# Altium PCB Power_Board_Gan_Cuk.PcbDoc (part 2 of 4)
Units mil, origin at the board's own origin, x right, y up, seen from the top; angles counter-clockwise.
Board outline 9910 x 8913.25 mil, 5 copper layers (Top Layer, Middle 1, HF Layer, Middle 4, Bottom Layer), stack 37.051 mil thick; 394 components, 188 nets, 1156 pads, 1424 vias.
Unrouted connection lines stored in the file: 6.
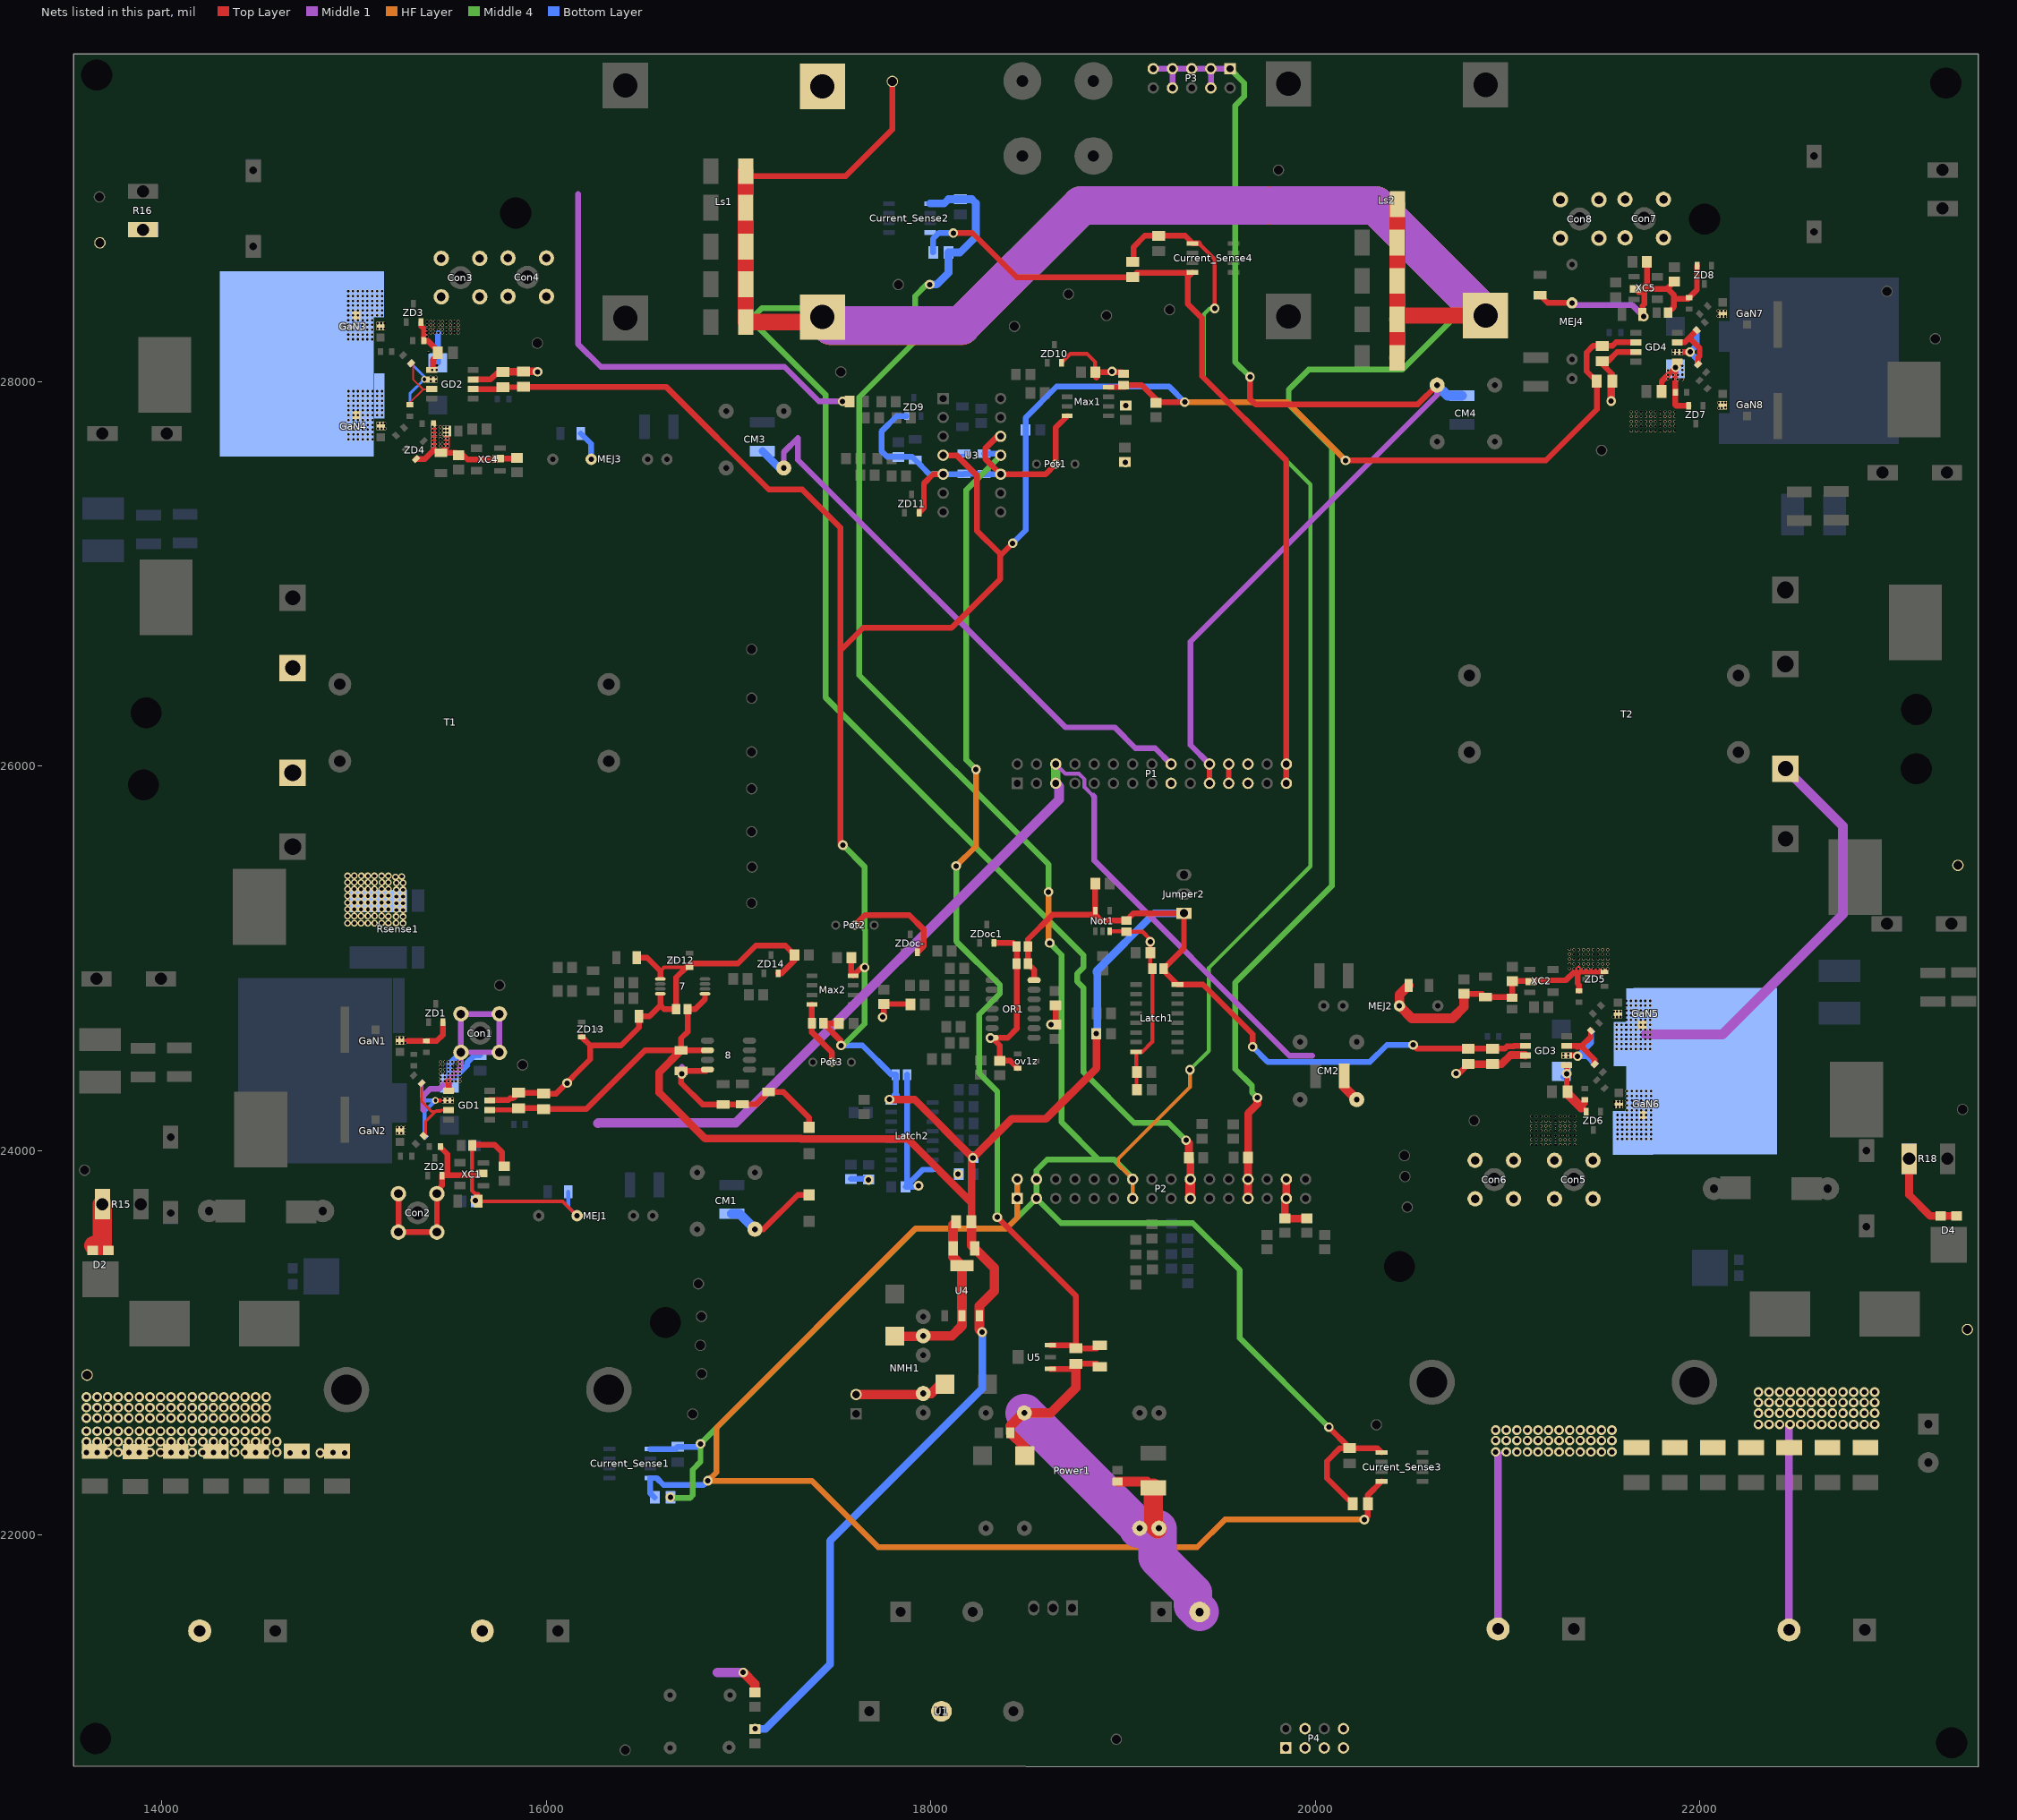
[diagram p5: the nets of this part, all layers, seen from the top]

## Part data
7: library part ina240, "GAIN 20"
C1 C2 C8 C9: "LLS2A332MELC"
C16 C17 C18 C19 C26 C27 C28 C29 C36 C39 C41 C44 C46 C49 C51 C54 Cg1 Cg2 Cg3 Cg4: library part Cap_SMD
  C16 C17 C18 C19 C26 C27 C28 C29: =100nF
  C36 C39: =0.1u
  Cg1: =1u
C20 C21 C22 C23 C30 C31 C32 C33 C57 C60 C61 C62 C65 C68 C69 C71 C76 C82 C83 C84 C85 C87 C89 C96 C99 C100 C101 C104: "Polarized Capacitor (Surface Mount)", LatestRevisionDate=29-May-2009, LatestRevisionNote="IPC-7351 Footprint Added.", PackageDescription="Chip Capacitor", PackageReference=C0805, Published=8-Jun-2000, Publisher="Altium Limited"
C37 C42 C47 C52 C70: library part Cap_tantalum
  C70: ="22uF/ 25V"
C56 C95: library part "Cap Pol3", "Polarized Capacitor (Surface Mount)", LatestRevisionDate=29-May-2009, LatestRevisionNote="IPC-7351 Footprint Added.", PackageDescription="Chip Capacitor", PackageReference=C0805, Published=8-Jun-2000, Publisher="Altium Limited"
C58 C72 C77 C81 C86 C88 C90 C91 C92 C93 C94 C97 Cdev: library part "Cap Semi", "Capacitor (Semiconductor SIM Model)", LatestRevisionDate=29-May-2009, LatestRevisionNote="IPC-7351 Footprint Added.", PackageDescription="Chip Capacitor", PackageReference=C1206, Published=8-Jun-2000, Publisher="Altium Limited"
C59 C63 C64 C98 C102 C103: "Capacitor (Semiconductor SIM Model)", LatestRevisionDate=29-May-2009, LatestRevisionNote="IPC-7351 Footprint Added.", PackageDescription="Chip Capacitor", PackageReference=C1206, Published=8-Jun-2000, Publisher="Altium Limited"
C105 C106 C107 C109 C111: library part "Cap Pol1", "Polarized Capacitor (Radial)", LatestRevisionDate=17-Jul-2002, LatestRevisionNote="Re-released for DXP Platform.", PackageReference=RB7.6-15, Published=8-Jun-2000, Publisher="Altium Limited"
C108 C110: "Capacitor", LatestRevisionDate=17-Jul-2002, LatestRevisionNote="Re-released for DXP Platform.", PackageReference=RAD-0.3, Published=8-Jun-2000, Publisher="Altium Limited"
Cd1 Cd2 Cd3: library part Cd
CM1 CM2 CM3 CM4: "Common mode choke"
Cs1 Cs2 Cs3 Cs4: library part Cap-CS
  Cs4: =990pF
Csnub1 Csnub2: library part Cap-Csnub, =10nF
Current_Sense1 Current_Sense2 Current_Sense3 Current_Sense4: library part "Current Sensor 5A"
D1 D2 D3 D4: "VS-4ESH02HM3"
FB1 FB2 FB3 FB4 FB5 FB6 FB7 FB8 R21 R22 R23 R25 R26 R27 R28 R30 R31 R32 R33 R35 R36 R37 R38 R40: "Resistor", LatestRevisionDate=29-May-2009, LatestRevisionNote="IPC-7351 Footprint Added.", PackageDescription="Chip Resistor", PackageReference=J1-0603, Published=8-Jun-2000, Publisher="Altium Limited"
FB9 FB10 FB11 FB12 FB13 FB14 FB15 NOTR R1 R2 R3 R4 R5 R6 R7 R8 R9 R10 R11 R12 R13 R14 R17 R20 R41 R42 R43 R44 R45 R46 R47 R48 R49 R50 R51 R52 R53 R54 R55 R56 R57 R58 R59 R60 R61 R62 R63 R64 R65 R66 R67 R68 R69 R70 R71 R72 R73 R74 R75 R76 R77 R78 R79 R80 R81 R82 R83 R84 R85 R86 R87 R88 R89 R90 R91 R92 R93 R94 Rdev Rdev2 Rdis1 Rdis2 Rdis3 Rdis4 Rdis5 Rdis6 Rdis7 Rdis8 Res Rl1 Rlatch Rlatch1 ROC Roc1tot Rov Rst: "smd_res"
  FB9 FB10 FB11 FB12 FB15: =0ohm
  FB13 FB14: =0
  NOTR: =50
  R1 R12: =180K
  R2 R3 R4 R5 R7 R8 R9 R11: =475K
  R6 R10: =5K
  R13 R17 R51 R55 R73 R74 R78: =120K
  R14: =1.8k
  R20: =1.8K
  R41 R44 R85 R88: =22k
  R42 R45 R86 R89: =392
  R43 R46 R50 R53 R54 R67 R69 R75 R77 R84 R87 R90: =10k
  R47 R48 R52 R70 R72 R83 R91 R92 R93 R94 Rdev Rdev2: =3.3k
  R49 R79 R81: =1meg
  R56 R61 R66 R68 R71 R82 Res Rlatch Rlatch1 ROC Roc1tot Rov Rst: =100
  R57 R58 R59 R60 R62 R63 R64 R65: =475k
  R76 R80: =10
  Rl1: =100ohms
Grid1: library part "Auxilary connector"
Latch1 Latch2: library part "SR Latch", "CD4043BDR"
Max1 Max2: library part Max942, "MAX942ESA+"
MEJ1 MEJ2 MEJ3 MEJ4: library part "Power supply2"
NMH1: library part NMH----SC_1
Not1: library part Inverter
OC OV: "Typical RED, GREEN, YELLOW, AMBER GaAs LED", LatestRevisionDate=17-Jul-2002, LatestRevisionNote="Re-released for DXP Platform.", PackageDescription="SM LED; 2 Flat Leads", PackageReference=3.2X1.6X1.1, PackageVersion=Feb-2002, Published=8-Jun-2000, Publisher="Altium Limited"
OR1: library part "2 input OR"
ov1z ZD1 ZD2 ZD3 ZD4 ZD5 ZD6 ZD7 ZD8 ZD9 ZD10 ZD11 ZD12 ZD13 ZD14 ZDoc1 ZDoc-: library part Zener_diode, "DZ23C8V2-7-F"
P1: library part "Header 15X2", "Header, 15-Pin, Dual row", LatestRevisionDate=17-Jul-2002, LatestRevisionNote="Re-released for DXP Platform.", Publisher="Altium Limited"
P2: library part "Header 16X2", "Header, 16-Pin, Dual row", LatestRevisionDate=17-Jul-2002, LatestRevisionNote="Re-released for DXP Platform.", Publisher="Altium Limited"
P3: "Header, 5-Pin, Dual row", LatestRevisionDate=17-Jul-2002, LatestRevisionNote="Re-released for DXP Platform.", Publisher="Altium Limited"
P4: library part "Header 4X2", "Header, 4-Pin, Dual row", LatestRevisionDate=17-Jul-2002, LatestRevisionNote="Re-released for DXP Platform.", Publisher="Altium Limited"
Pot1 Pot2 Pot3: library part "TRIM POT", "3296W-1-253LF"
Power1: library part Power_main
R15 R16 R18 R19: "snubber_res_film"
  R15 R16 R19: ="5 ohm"
  R18: =5ohm
R24 R29 R34 R39: library part Res3, "Resistor", LatestRevisionDate=29-May-2009, LatestRevisionNote="IPC-7351 Footprint Added.", PackageDescription="Chip Resistor", PackageReference=J1-0603, Published=8-Jun-2000, Publisher="Altium Limited"
RSP3: library part Res_Rd
SW1: library part SW-PB, "Switch", Published=24-Mar-1999, Publisher="Altium Limited", Revision="July-2002: Re-released for DXP Platform."
U1: library part "P-Terminal 3"
U2: library part "P-Terminal 2"
U3: library part TL074J, "Low-Noise JFET-Input Operational Amplifier", ComponentLink1Description="Manufacturer Link", ComponentLink1URL=http://www.ti.com/, ComponentLink2Description=Datasheet, ComponentLink2URL=http://www-s.ti.com/sc/ds/tl074.pdf, DatasheetVersion=Aug-1996, LatestRevisionDate=04-Mar-2005, LatestRevisionNote="Stylized 3D Model Added.", PackageDescription="DIP; 14 Leads; Row Spacing 7.62 mm; Pitch 2.54 mm", PackageReference=J014, PackageVersion=Jun-1999, Published=16-Jan-2001, Publisher="Altium Limited"
U4: library part µA7805CKTER, "Positive-Voltage Regulator", Code_JEDEC=MO-169, ComponentLink1Description="Manufacturer Link", ComponentLink1URL=http://www.ti.com/, ComponentLink2Description=Datasheet, ComponentLink2URL=http://www-s.ti.com/sc/ds/ua7805.pdf, DatasheetVersion=Jul-1999, Note="Pin 2 is electrically connected to TAB/Pin4.", PackageDescription="PowerFLEX; 3 Leads; Body 10.7 (inc. leads) x 9.5 mm (LxW max)", PackageReference=KTE03, PackageVersion=Jan-2001, Published=15-Apr-2002, Publisher="Altium Limited"
U5: library part µA79M05CKTPR, "Negative-Voltage Regulator", Code_JEDEC=TO-252, ComponentLink1Description="Manufacturer Link", ComponentLink1URL=http://www.ti.com/, ComponentLink2Description=Datasheet, ComponentLink2URL=http://www-s.ti.com/sc/ds/ua79m05.pdf, DatasheetVersion=Apr-2000, Note="Pin 2 is electrically connected to pin4, and not drawn.", PackageDescription="PowerFLEX (D-PAK/TO-252-AA); 3 Leads (1 Cropped); Body 9.7 (inc. leads) x 6.2 mm (LxW max)", PackageReference=KTP02, PackageVersion=Jan-2001, Published=15-Apr-2002, Publisher="Altium Limited"
XC1 XC2 XC4 XC5: library part "power supply"
C01 C02 C03 C04 C05 C011 C022 C033 C044 C055: =2.2uF/250V
C3 C4 C5 C6 C7 C10 C11 C12 C13 C14 C15 CIN1 CIN2 CIN3 CIN4: =10uF/100v
L_snub1 L_snub2: =2.5uH
RSP1: =5ohm
RSP2: ="5 ohm"

## Free pads (board coordinates)
  round 0 hole 161.42: 18(13660,29595) 18(13904,25901) 18(16619,23104) 18(20439,23396) 18(23311,20918) 20(13655,20940) 20(13918,26277) 20(15840,28877) 20(22026,28846) 20(23127,25986) 20(23128,26294) 20(23281,29554)
  rect 669.29x964.57 smd far side: ""(14636,28092) ""(14731,24414)
  rect 140x965 smd far side: ""(15032,28092) ""(15128,24415)
  rect 55x240.16 smd far side: ""(15127,28455)
  rect 55x235 smd far side: ""(15131,27925)
  rect 59.06x287.4 smd far side: ""(15232,24753)
  rect 78.74x204.72 smd far side: ""(15234,24247)
  rect 78.74x230 smd far side: ""(21588,24091) ""(21593,24553)
  rect 140x867 smd far side: ""(21688,24410)
  rect 748.03x866.14 smd far side: ""(22029,24412) ""(22662,28108)
  rect 55x161.42 smd far side: ""(22128,27756) ""(22128,28236)
  rect 140x866.14 smd far side: ""(22225,28108)

## Via types
v1: diameter 15, hole 12, Top Layer to Bottom Layer, 976 vias
v2: diameter 50, hole 28, Top Layer to Bottom Layer, 343 vias
v3: diameter 35, hole 20, Top Layer to Bottom Layer, 74 vias
v4: diameter 35, hole 25, Top Layer to Bottom Layer, 30 vias
v5: diameter 100, hole 50, Top Layer to Bottom Layer, 1 vias

## Nets (pads, with @x,y where several pads share a name; then routed paths per layer and width w, separated by ;. In a path a pad name is that pad's centre, name@x,y a point inside that pad or via, vN(x,y) a via of type N, cw(c..) or ccw(c..) an arc to the next point about the centre after c; other vN are vias at no path point)
+5V_P: 7.5 8.2 C39.1 C44.1 C49.1 C54.1 C71.1 C76.1 C77.2 C82.1 C83.1 C84.1 C85.1 C87.1 C89.1 C93.2 C107.1 C108.2 Cg1.1 Cg2.1 Cg3.1 Cg4.1 GD1.2 GD2.2 GD3.2 GD4.2 Jumper2.1 Latch1.16 Latch2.16 Max1.8 Max2.8 Not1.5 OR1.14 R50.2 R51.2 R54.2 R55.2 R69.2 R74.2 R78.2 R84.2 U3.4 U4.3 | length 26605.4
  Top Layer w25: GD1.2@15707.28,24210 C39.1@15845,24210
  Top Layer w30: GD2.2@15624.28,27961 15625.28,27960 15762,27960 Cg2.1@15773,27971 15878.88,27971 C44.1@15880.88,27973 16623,27973 17157,27439 17331,27439 17530,27240 17530,26600 ; C39.1@15845,24210 C39.1@15855,24220 15980,24220 Cg1.1@15985,24215 16208,24215 16513.15,24520.15 C93.2@16701,24520.15 ; 7.5@16825.14,24806.35 16825.14,24786.14 16774,24735 C89.1@16734.53,24735 16734.53,24616.53 16701,24583 C93.2@16701,24520.15 ; 8.2@16837.75,24521 16836.9,24520.15 C93.2@16701,24520.15 ; R78.2@17522.6,24661 C85.1@17440.53,24661 17533,24568.53 v2(17533,24546) ; v2(17543,25588) 17530,25588 17530,26600 ; R74.2@17586.4,25003 17586.4,24918.88 Max2.8@17596.3,24908.98 17639.31,24952 v2(17656,24952) ; U3.4@18064,27616.72 18134.28,27616.72 18239,27512 18239,27225 18361,27103 18361,27094 ; v2(18426,27159) 18361,27094 ; OR1.14@18537.25,24886 18537.25,24939.28 C83.1@18505.53,24971 C84.1@18505.53,25061 18505.53,25098.53 18632.4,25225.4 18855.6,25225.4 ; R69.2@18856.6,25388 18855.6,25387 Not1.5@18855.6,25248.15 18855.6,25225.4 ; Max1.8@18924.3,27970.98 C76.1@19011.51,27970.98 ; C76.1@19002,27982 19098,27982 19172,27908 R51.2@19172,27890.4 19174.6,27893 v2(19321,27893) ; v2(19674,24539) 19674,24605 19416,24863 Latch1.16@19283.28,24863 19211.53,24934.76 C71.1@19211.53,24946 19317,25051.47 Jumper2.1@19317,25234 19055.47,25234 C82.1@19018,25196.53 18884.47,25196.53 18855.6,25225.4 ; v2(20158,27590) 21200,27590 21465,27855 C54.1@21465,28003 21463,28003 21412,28054 21412,28152 21446,28186 Cg4.1@21493,28186 21546.29,28186 21565.29,28205 21669.72,28205 GD4.2@21670.72,28204 ; v2(20510,24549) 20530,24529 Cg3.1@20796,24529 C49.1@20923,24529 20986.29,24529 20998.29,24541 21032.71,24541 21035.71,24544 GD3.2@21093.72,24544 ; 17530,26600 17649,26719 18108,26719 18361,26972 18361,27094
  Top Layer w40: C93.2@16701,24520.15 16587,24406.15 16587,24300 16826,24061 17324.42,24061 17325.05,24060.37 17879.63,24060.37 18212,23728 ; R50.2@17085,20989.8 v2(17086,20990.8) ; v2(17785,24265) 17915,24265 v2(18219,23961) ; C108.2@18212,23629 18212,23728 ; v2(18861.6,24607) 18861.6,24426.6 18599,24164 18422,24164 v2(18219,23961) ; 18212,23728 18212,23954 v2(18219,23961)
  Top Layer w50: C108.2@18212,23629 18212,23506.1 C107.1@18228.1,23490 18331,23387.1 18331,23269 18252.55,23190.55 U4.3@18252.55,23140 18252.55,23068.45 v2(18267,23054)
  Middle 4 w30: v2(17533,24546) 17544,24546 17656,24658 v2(17656,24952) 17659,24955 17659,25146.62 17656.38,25149.24 17656.38,25474.62 v2(17543,25588)
  HF Layer w30: v2(19321,27893) 19855,27893 v2(20158,27590)
  Bottom Layer w15: C77.2@18141.72,27616.72 C77.2@18174.99,27616.72
  Bottom Layer w20: U3.4@18064,27616.72 C77.2@18141.72,27616.72
  Bottom Layer w30: v2(17533,24546) 17644,24546 17796,24394 C87.1@17817.47,24394 17817.47,24288 ; v2(18426,27159) 18493.6,27226.6 R55.2@18493.6,27748 18493.6,27812.6 18655,27974 19240,27974 v2(19321,27893) ; v2(19674,24539) 19753,24460 20284,24460 20373,24549 v2(20510,24549)
  Bottom Layer w40: v2(17086,20990.8) 17140.8,20990.8 17476,21326 17476,21969 18267,22760 v2(18267,23054) ; v2(17785,24265) 17817.47,24265 17817.47,24288 ; v2(18861.6,24607) 18866,24611.4 18866,24921.78 18861.6,24926.18 18861.6,24932.6 19163,25234 Jumper2.1@19317,25234
-5V_P: C109.2 C110.1 Cdev.2 U3.11 U5.3 | length 5508.8
  Top Layer w30: v2(18346,23652) 18754.95,23243.05 C110.1@18754.95,22970 ; U5.3@18621.32,22986.81 18738.14,22986.81 C110.1@18754.95,22970 ; C109.2@18879,22986.1 18862.9,22970 C110.1@18754.95,22970
  Middle 4 w30: v2(18132,25480) 18132,25088 18360,24860 18360,24816 18251,24707 18251,24401 18346,24306 v2(18346,23652) v2@18337,23661 ; v2(18235,25982) 18184,26033 18184,27435.45 18365.28,27616.72 U3.11@18363.21,27616.72
  HF Layer w30: v2(18132,25480) 18235,25583 v2(18235,25982)
  Bottom Layer w30: Cdev.2@18278,27625.15 18354.79,27625.15 U3.11@18363.21,27616.72 U3.11@18363.28,27616.72
-12: P1.23 P1.24 | length 100
  Top Layer w30: P1.23@19550,25910 P1.24@19550,26010
DSP_5V: C16.1 C18.1 C26.1 C28.1 Current_Sense1.8 Current_Sense2.8 Current_Sense3.8 Current_Sense4.8 P1.29 P1.30 P2.1 P2.2 | length 11219.1
  Top Layer w30: v2(18117,28773) 18217,28773 18447,28543 C28.1@19050,28543 19072,28565 19336.82,28565 19336.82,28543 ; Current_Sense4.8@19362.25,28568.43 19336.82,28543 ; P1.29@19850,25910 P1.30@19850,26010 19850,27589 19411,28028 19411,28330 19336.82,28404.18 19336.82,28543 ; v2(20256,22079) 20274,22097 C26.1@20274,22161 20274,22206.67 Current_Sense3.8@20345.13,22277.8
  HF Layer w30: P2.2@18450,23850 P2.1@18450,23750 18450,23649 18394,23593 17920,23593 16884,22557 16884,22325 v2(16840,22281) 17380,22281 17726,21935 19386,21935 19530,22079 v2(20256,22079)
  Bottom Layer w30: C16.1@16563,22194 16540.75,22216.25 Current_Sense1.8@16540.75,22295.43 16573.57,22295.43 16610,22259 16818,22259 v2(16840,22281) ; C18.1@18012,28672 18012,28744 18041,28773 v2(18117,28773)
DSP_GND: C16.2 C17.2 C18.2 C19.2 C26.2 C27.2 C28.2 C29.2 Current_Sense1.5 Current_Sense2.5 Current_Sense3.5 Current_Sense4.5 P2.3 P2.4 P2.13 P2.14 | length 18888.7
  Top Layer w20: 19394.98,28719.02 19477,28637 v2(19477,28381)
  Top Layer w30: C28.2@19050,28623 19055,28628 19055,28700 19114,28759 C29.2@19186,28759 19322.28,28759 Current_Sense4.5@19362.25,28719.02 19394.98,28719.02 ; v2(20071,22560) 20071,22559 C27.2@20179,22451 ; C26.2@20194,22161 20061,22294 20061,22383 20129,22451 C27.2@20179,22451 ; Current_Sense3.5@20345.13,22428.39 20322.53,22451 C27.2@20179,22451
  Middle 4 w20: v2(19348,24419) 19447,24518 19447,24950 19975,25478 19975,27464 19421,28018 19421,28351 19451,28381 v2(19477,28381)
  Middle 4 w30: v2(16645,22195) 16648,22192 16748,22192 16761,22205 16761,22339 16802,22380 v2(16802,22473) 17922,23593 18393,23593 P2.3@18550,23750 ; v2(17994,28505) 17978,28505 17918,28445 17918,28209 17628,27919 17628,26472 18612,25488 v2(18612,25345) ; v2(18618,25079) 18680,25017 18680,24147 18874,23953 ; P2.14@19050,23850 19050,23857 18954,23953 18874,23953 ; v2(20071,22560) 19607,23024 19607,23378 19363,23622 18678,23622 P2.3@18550,23750 ; P2.3@18550,23750 P2.4@18550,23850 18550,23897 18606,23953 18874,23953
  HF Layer w20: P2.13@19050,23750 P2.14@19050,23850 19050,23852 18975,23927 18975,23956 19348,24329 v2(19348,24419)
  HF Layer w30: v2(18612,25345) 18612,25085 v2(18618,25079)
  Bottom Layer w30: Current_Sense1.5@16540.75,22446.02 16671.02,22446.02 C17.2@16683,22458 16787,22458 v2(16802,22473)
  Bottom Layer w40: v2(17994,28505) 18031,28505 18092,28566 C18.2@18092,28672 18152,28672 18234,28754 18234,28928 18213,28949 C19.2@18154,28949 18092,28949 18069.02,28926.02 Current_Sense2.5@17995.75,28926.02
G1: GD1.7 R22.1 R23.1 | length 445.2
  Top Layer w15: R22.1@15350.88,24349.12 15350.88,24254.87 15403.25,24202.5 15422.5,24202.5 ; R23.1@15370.88,24070.88 15370.88,24150.88 15422.5,24202.5 ; GD1.7@15492.72,24210 GD1.7@15490.72,24210 15454.25,24210 15451.75,24207.5 ; 15422.5,24202.5 15427.5,24207.5 15451.75,24207.5 ; 15422.5,24202.5 15446.75,24202.5 15451.75,24207.5
G2: GD1.6 R24.1 R25.1 | length 427.5
  Top Layer w20: v3(15422.94,24260) GD1.6@15490.72,24260 GD1.6@15492.72,24260
  Bottom Layer w20: R25.1@15350.88,24349.12 15350.88,24279.12 15370,24260 v3(15422.94,24260) 15365.88,24202.94 R24.1@15365.88,24075.88
  other v1: 15460,24250 15485,24250 15510,24250 15460,24270 15485,24270 15510,24270
G3: GD2.7 R27.1 R28.1 | length 320.9
  Top Layer w10: R27.1@15290,27879.44 15290,27890 15359,27959 ; R28.1@15296.67,28096.12 15306,28086.79 15306,28012 15359,27959 ; GD2.7@15406.72,27964 GD2.7@15403.72,27961 15401.72,27959 15359,27959
G4: GD2.6 R29.1 R30.1 | length 321.9
  Top Layer w15: v3(15365,28012) 15408.72,28012 GD2.6@15409.72,28011
  Bottom Layer w15: R30.1@15290,27879.44 15290,27937 v3(15365,28012) 15365,28026 R29.1@15294.88,28096.12
  other v1: 15398,28002 15426,28002 15398,28023 15425,28024
G5: GD3.7 R32.1 R33.1 | length 327.2
  Top Layer w30: GD3.7@21308.28,24544 21356,24544 ; R33.1@21434.12,24622.12 21434.12,24591.12 21387,24544 21356,24544 ; R32.1@21454.12,24448.88 21454.12,24471.59 21385.71,24540 21360,24540 21356,24544
G6: GD3.6 R34.1 R35.1 | length 323.7
  Top Layer w30: GD3.6@21308.28,24494 21361,24494 v2(21365,24490)
  Bottom Layer w30: R34.1@21436.12,24620.12 21436.12,24561.12 v2(21365,24490) 21414,24490 R35.1@21454.12,24449.88
  other v1: 21290,24486 21316,24486 21290,24502 21316,24502
G7: GD4.7 R37.1 R38.1 | length 290
  Top Layer w30: GD4.7@21885.28,28204 21922,28204 21946.5,28228.5 ; R37.1@21985.12,28267.12 21946.5,28228.5 ; R38.1@21992.12,28089.88 21992.12,28125.41 22000,28133.29 22000,28175 21946.5,28228.5
G8: GD4.6 R39.1 R40.1 | length 271.1
  Top Layer w30: GD4.6@21885.28,28154 v2(21950,28154)
  Bottom Layer w30: R40.1@21984.12,28265.12 21984.12,28188.12 v2(21950,28154) 21991.12,28112.88 R39.1@21991.12,28089.88
  other v1: 21862,28145 21882,28145 21905,28145 21863,28162 21882,28162 21905,28162
GND: 7.1 7.4 8.4 "Logic supply1.2" C1.- C2.- C3.2 C4.2 C5.2 C6.2 C7.2 C8.- C9.- C10.2 C11.2 C12.2 C13.2 C14.2 C15.2 C39.2 C44.2 C49.2 C54.2 C56.2 C61.2 C68.2 C69.2 C70.2 C71.2 C76.2 C77.1 C81.2 C82.2 C83.2 C84.2 C85.2 C86.2 C87.2 C89.2 C90.1 C91.1 C92.1 C93.1 C94.1 C95.2 C100.2 C105.2 C106.2 C107.2 C108.1 C109.1 C110.2 C111.1 Cdev.1 Cg1.2 Cg2.2 Cg3.2 Cg4.2 CIN1.2 CIN2.1 CIN3.2 CIN4.1 CM1.4 CM2.4 CM3.4 CM4.4 D2.1 D4.1 GaN5.S GaN6.S GD1.3 GD2.3 GD3.3 GD4.3 Latch1.8 Latch2.8 Max1.4 Max2.4 NMH1.2 NMH1.5 Not1.3 OC.2 OR1.7 ov1z.2 OV.2 P1.5 P1.6 P1.17 P1.18 P1.21 P1.22 P1.25 P1.26 P2.29 P2.30 P3.1 P3.3 P3.4 P3.5 P3.7 P3.8 P3.9 P4.1 P4.3 P4.4 P4.5 P4.7 P4.8 pad.@21588,24091 pad.@21593,24553 pad.@21688,24410 pad.@22029,24412 Pot1.2 Pot2.2 Pot3.2 Power1.2 Power1.3 Power1.16 R6.1 R10.1 R15.1 R18.1 R47.2 R48.2 R49.1 R52.2 R67.2 R70.2 R72.1 R73.1 R79.1 R81.2 R83.2 R91.2 R92.2 R93.2 R94.2 Rdev2.2 Rdev.1 Rl1.1 Rsense1.2 T1.2 T2.2 TP10.1 TP18.1 TP29.1 U1.2 U3.5 U3.10 U3.12 U4.2 U4.4 U5.1 ZD9.2 ZD10.2 ZD11.2 ZD12.1 ZD13.2 ZD14.2 ZDoc1.2 ZDoc-.2 | length 36969.5
  Top Layer w20: 16592.86,24933.14 16612.72,24953 ZD12.1@16728,24953 ; ZD10.2@18679.4,28097.76 18726.65,28145 18812,28145 18855.4,28101.6 R52.2@18855.4,28049 ; Not1.3@18930.4,25139.88 19015.59,25139.88 C82.2@19018,25137.47 19101.53,25137.47 19141.4,25097.6 v2(19141.4,25085) R47.2@19141.4,25029 19141.4,24957.07 C71.2@19152.47,24946 19152.47,24564.47 19101,24513 Latch1.8@19068.72,24513 19068.72,24400.88 19070.6,24399 19070.6,24315 R48.2@19069.6,24314
  Top Layer w30: GD2.3@15618.28,28011 15709.71,28011 15749.71,28051 Cg2.2@15773,28051 ; GD1.3@15705.28,24260 15705.28,24262 15802.59,24262 15811.18,24270.59 15825.59,24270.59 C39.2@15855,24300 15980,24300 Cg1.2@15985,24295 16050,24295 16228.35,24473.35 16228.35,24546 ; ZD13.2@16182.76,24591.6 16228.35,24546 ; C86.2@16470.15,25003 16523,25003 16592.86,24933.14 7.1@16592.86,24899.65 ; 7.4@16592.86,24806.35 16592.86,24754.86 ; ZD12.1@16728,24953 16675.47,24900.47 C89.2@16675.47,24735 16612.72,24735 16592.86,24754.86 ; 16747,24972 16996,24972 17089,25065 17242.6,25065 Rdev2.2@17290.6,25017 17290.6,24988.6 17223.76,24921.76 ZD14.2@17206.4,24921.76 ; 8.4@16837.75,24421 16830.6,24413.85 C93.1@16701,24413.85 16701,24351 16813.15,24238.85 C92.1@16919,24238.85 17018,24238.85 C91.1@17019,24239.85 17092,24239.85 C94.1@17156,24303.85 17233.15,24303.85 17367,24170 OV.2@17367,24119.9 ; CM1.4@17085,23590 17129,23590 17308,23769 OC.2@17366,23769 ; Max2.4@17381.73,24758.98 17381.47,24758.72 C85.2@17381.47,24661 17381.47,24614.53 17486,24510 Pot3.2@17486,24459 ; Pot2.2@17605,25172 17657,25224 17889,25224 17962,25151 17962,25062.35 ZDoc-.2@17929.4,25029.76 ; v2(17749,24693) 17755,24699 Rdev.1@17755,24761.6 17892,24761.6 R70.2@17894.6,24759 ; ZD11.2@17938.4,27317.76 17964,27343.35 17964,27470 18012.3,27518.3 U3.5@18064,27518.3 ; v2(18310,24585) 18317.75,24585 OR1.7@18318.75,24586 ; ZDoc1.2@18329.4,25079.76 18427.72,25079.76 C84.2@18446.47,25061 C83.2@18446.47,24971 18446.47,24632.47 18400,24586 OR1.7@18318.75,24586 ; U3.12@18363.21,27715.15 18346.15,27715.15 18283,27652 18283,27598.51 U3.10@18363.21,27518.3 18597.3,27518.3 Pot1.2@18650,27571 18650,27761.25 Max1.4@18709.73,27820.98 ; ov1z.2@18451.76,24427.6 18412.95,24466.4 R72.1@18359,24466.4 18359,24545.75 OR1.7@18318.75,24586 ; U5.1@18621.32,22863.19 18728.14,22863.19 C110.2@18754.95,22890 18862.9,22890 C109.1@18879,22873.9 ; R92.2@18622,24658 v2(18625.6,24654.4) R92.2@18649,24654.4 ; R92.2@18649,24658 R91.2@18649,24754.6 ; R52.2@18861.02,28022 18855.4,28027.61 R52.2@18855.4,28049 18994.06,28049 C76.2@19002,28041.06 ; R73.1@19009.58,27870.98 v2(19014,27875.4) ; P1.21@19450,25910 P1.22@19450,26010 ; v2(19661,28025) 19661,27910 19690,27881 20533,27881 CM4.4@20634,27982 ; v2(20733,24400) 20747,24400 Cg3.2@20796,24449 ; C54.2@21545,28003 21545,28040 21486,28099 Cg4.2@21493,28106 21522.86,28106 21570.86,28154 GD4.3@21668.72,28154 ; 16228.35,24546 16388,24546 16481.15,24639.15 C90.1@16481.15,24698 16536,24698 16592.86,24754.86
  Top Layer w40: Cg2.2@15773,28051 15878.88,28051 C44.2@15880.88,28053 15952,28053 v2(15954,28051) ; P2.30@19850,23850 P2.29@19850,23750 19842,23742 R6.1@19842,23645.4 R10.1@19957,23645.4 ; Cg3.2@20796,24449 C49.2@20923,24449 20969.93,24449 21016.93,24496 21091.72,24496 GD3.3@21093.72,24494 ; v2(21540,27899) 21540,27998 C54.2@21545,28003 ; R18.1@23090,23956 23090,23769 23200,23659 D4.1@23254,23659 D4.1@23336.68,23659
  Top Layer w50: v2(17024,21284) 17085,21223 R49.1@17085,21180 ; C106.2@17611,22730 NMH1.2@17960,22730 ; C105.2@17812,23033 17958,23033 NMH1.5@17960,23035 18110,23035 18162,23087 U4.2@18162,23140 U4.4@18162,23400 18115.9,23446.1 C107.2@18115.9,23490 18115.9,23612.9 C108.1@18132,23629 ; NMH1.2@17960,22735 18002,22735 C111.1@18074,22807 ; Power1.16@18479,22631 18413.53,22565.53 C69.2@18413.53,22531 18489,22455.53 C70.2@18489,22411 ; Power1.16@18487,22634 18624,22634 18754.95,22764.95 C110.2@18754.95,22890 ; C68.2@18971,22276.47 19125.01,22276.47 C13.2@19158,22243.48 ; C61.2@20150.8,24388 20150.8,24329.2 CM2.4@20216,24264
  Top Layer w100: 13645,23505 13690,23505 R15.1@13690,23720 ; C13.2@19158,22243.48 19158,22052 Power1.2@19179,22031
  Middle 1 w20: P1.6@18650,26010 18700.47,25959.53 18770.51,25959.53 18799.53,25930.51 18799.53,25890.43 18844.96,25845
  Middle 1 w30: v2(16705,24398) 16705,24434 ; CM3.4@17235,27551 17235,27633 17309,27707 17309,27593 18701,26201 18957,26201 19065,26093 19167,26093 P1.18@19250,26010 ; 18845,25845 18850,25840 18850,25509 19866,24493 19984,24493 ; P3.9@19157,29628 P3.7@19257,29628 ; P3.8@19257,29528 P3.7@19257,29628 ; P1.21@19450,25910 P1.22@19450,26010 19351,26109 19351,26647 20634,27930 CM4.4@20634,27982 ; P3.4@19457,29528 P3.3@19457,29628 ; P3.1@19557,29628 P3.3@19457,29628 ; P3.7@19257,29628 P3.5@19357,29628 P3.3@19457,29628
  Middle 1 w40: v2(20939,22431) 20951.3,22418.7 C9.-@20951.3,21510 ; C8.-@22465,21505 22465,22568 v2(22471,22574)
  Middle 1 w50: 16269,24141 16271,24143 16985,24143 18667,25825 18667,25893 P1.5@18650,25910 ; 16890,21284 v2(17024,21284) ; v1(21718,24603) v1(21743,24603) 22119,24603 22745,25229 22745,25687.88 T2.2@22446.88,25986
  Middle 1 w200: Power1.16@18487,22634 Power1.3@19087,22034 ; Power1.3@19079,22031 19179,22031 19179,21882.13 19363.07,21698.06 19363.07,21634.03 19398.74,21598.36
  Middle 4 w30: P3.1@19557,29628 19631,29554 19631,29483 19583,29435 19583,28103 v2(19661,28025)
  Middle 4 w50: P1.5@18650,25910 P1.6@18650,26010
  Bottom Layer w30: R79.1@17584,23851.6 17675,23851.6 R94.2@17677,23849.6 ; ZD9.2@17873.79,27820.76 17823.76,27820.76 17743,27740 17743,27639 17773.4,27608.6 R67.2@17831,27608.6 17903.25,27608.6 C81.2@17919,27592.85 17953.4,27558.45 17953.4,27557.2 17992.3,27518.3 U3.5@18064,27518.3 18171.45,27518.3 C77.1@18173,27519.85 18277,27519.85 Cdev.1@18278,27518.85 18362.66,27518.85 U3.10@18363.21,27518.3 ; C87.2@17876.53,24394 R93.2@17876.53,23818.13 ; v2(17936,23816) 17931,23811 R93.2@17869.4,23811 R93.2@17876.53,23818.13 ; Latch2.8@18009.28,23900 17958.4,23900 R93.2@17876.53,23818.13
  Bottom Layer w40: C95.2@17124,27638.2 17211.2,27551 CM3.4@17235,27551
  Bottom Layer w50: C56.2@16965,23670.2 17004.8,23670.2 CM1.4@17085,23590 ; CM4.4@20634,27982 20689.2,27926.8 C100.2@20763,27926.8
  other v1: 21572,24059 21597,24059 21622,24059 21647,24059 21672,24059 21697,24059 21722,24059 21747,24059 21572,24084 21597,24084 21622,24084 21647,24084 21672,24084 21697,24084 21722,24084 21747,24084 21572,24109 21597,24109 21622,24109 21647,24109 21672,24109 21697,24109 21722,24109 21747,24109 21572,24134 21597,24134 21622,24134 21647,24134 21672,24134 21697,24134 21722,24134 21747,24134 21572,24159 21597,24159 21622,24159 21647,24159 21672,24159 21697,24159 21722,24159 21747,24159 21572,24184 21597,24184 21622,24184 21647,24184 21672,24184 21697,24184 21722,24184 21747,24184 21622,24209 21647,24209 21672,24209 21697,24209 21722,24209 21747,24209 21622,24234 21647,24234 21672,24234 21697,24234 21722,24234 21747,24234 21622,24259 21647,24259 21672,24259 21697,24259 21722,24259 21747,24259 21622,24284 21647,24284 21672,24284 21697,24284 21722,24284 21747,24284 21622,24309 21647,24309 21672,24309 21697,24309 21722,24309 21747,24309 21568,24528 21593,24528 21618,24528 21643,24528 21668,24528 21693,24528 21718,24528 21743,24528 21568,24553 21593,24553 21618,24553 21643,24553 21668,24553 21693,24553 21718,24553 21743,24553 21568,24578 21593,24578 21618,24578 21643,24578 21668,24578 21693,24578 21718,24578 21743,24578 21568,24603 21593,24603 21618,24603 21643,24603 21668,24603 21693,24603 21568,24628 21593,24628 21618,24628 21643,24628 21668,24628 21693,24628 21718,24628 21743,24628 21568,24653 21593,24653 21618,24653 21643,24653 21668,24653 21693,24653 21718,24653 21743,24653 21618,24678 21643,24678 21668,24678 21693,24678 21718,24678 21743,24678 21618,24703 21643,24703 21668,24703 21693,24703 21718,24703 21743,24703 21618,24728 21643,24728 21668,24728 21693,24728 21718,24728 21743,24728 21618,24753 21643,24753 21668,24753 21693,24753 21718,24753 21743,24753 21618,24778 21643,24778 21668,24778 21693,24778 21718,24778 21743,24778
  other v2: 14666,22425 14823,22426 14951,22426 14741,22428 14889,22428 13607,22429 13662,22429 13717,22429 13772,22429 13827,22429 13882,22429 13937,22429 13992,22429 14047,22429 14102,22429 14157,22429 14212,22429 14267,22429 14322,22429 14377,22429 14432,22429 14487,22429 14542,22429 14597,22429 20994,22431 21049,22431 21104,22431 21159,22431 21214,22431 21269,22431 21324,22431 21379,22431 21434,22431 21489,22431 21544,22431 13607,22484 13662,22484 13717,22484 13772,22484 13827,22484 13882,22484 13937,22484 13992,22484 14047,22484 14102,22484 14157,22484 14212,22484 14267,22484 14322,22484 14377,22484 14432,22484 14487,22484 14542,22484 14597,22484 20939,22490 20994,22490 21049,22490 21104,22490 21159,22490 21214,22490 21269,22490 21324,22490 21379,22490 21434,22490 21489,22490 21544,22490 13607,22539 13662,22539 13717,22539 13772,22539 13827,22539 13882,22539 13937,22539 13992,22539 14047,22539 14102,22539 14157,22539 14212,22539 14267,22539 14322,22539 14377,22539 14432,22539 14487,22539 14542,22539 20939,22545 20994,22545 21049,22545 21104,22545 21159,22545 21214,22545 21269,22545 21324,22545 21379,22545 21434,22545 21489,22545 21544,22545 22306,22574 22361,22574 22416,22574 22526,22574 22581,22574 22636,22574 22691,22574 22746,22574 22801,22574 22856,22574 22911,22574 13607,22607 13662,22607 13717,22607 13772,22607 13827,22607 13882,22607 13937,22607 13992,22607 14047,22607 14102,22607 14157,22607 14212,22607 14267,22607 14322,22607 14377,22607 14432,22607 14487,22607 14542,22607 22306,22633 22361,22633 22416,22633 22471,22633 22526,22633 22581,22633 22636,22633 22691,22633 22746,22633 22801,22633 22856,22633 22911,22633 13607,22662 13662,22662 13717,22662 13772,22662 13827,22662 13882,22662 13937,22662 13992,22662 14047,22662 14102,22662 14157,22662 14212,22662 14267,22662 14322,22662 14377,22662 14432,22662 14487,22662 14542,22662 22306,22688 22361,22688 22416,22688 22471,22688 22526,22688 22581,22688 22636,22688 22691,22688 22746,22688 22801,22688 22856,22688 22911,22688 13607,22717 13662,22717 13717,22717 13772,22717 13827,22717 13882,22717 13937,22717 13992,22717 14047,22717 14102,22717 14157,22717 14212,22717 14267,22717 14322,22717 14377,22717 14432,22717 14487,22717 14542,22717 22306,22743 22361,22743 22416,22743 22471,22743 22526,22743 22581,22743 22636,22743 22691,22743 22746,22743 22801,22743 22856,22743 22911,22743 17676,23846 18142,23877 16108,24350 19013,27580 18943,28053
  other v3: 15254,25181 14966,25182 15001,25182 15036,25182 15071,25182 15106,25182 15142,25183 15177,25183 15218,25183 15218,25216 15254,25216 15177,25218 14966,25219 15001,25219 15036,25219 15071,25219 15106,25219 15142,25219 15219,25251 15254,25251 14966,25254 15001,25254 15036,25254 15071,25254 15106,25254 15142,25254 15178,25254 15219,25286 15254,25286 14966,25289 15001,25289 15036,25289 15071,25289 15106,25289 15143,25289 15178,25290 15219,25321 15254,25321 14966,25324 15001,25324 15036,25324 15071,25324 15106,25324 15142,25324 15178,25325 15219,25356 15254,25356 14966,25359 15001,25359 15036,25359 15071,25359 15106,25359 15143,25360 15178,25360 15219,25391 15254,25391 14966,25394 15001,25394 15036,25394 15071,25394 15106,25394 15144,25394 15178,25394 15215,25423 15247,25425 14966,25428 15037,25428 15071,25428 15105,25428 15143,25428 15177,25428 15001,25429
GND_P1: C36.2 C37.2 C58.1 C59.1 C60.2 Con1.0 Con1.1 Con1.2 Con1.3 Con2.0 Con2.1 Con2.2 Con2.3 GaN1.SS GaN2.SS GD1.5 MEJ1.5 R42.2 R43.2 Rdis1.2 Rdis2.2 XC1.2 ZD1.2 ZD2.2 | length 4283.2
  Top Layer w20: 15612.72,23882.28 15612.72,24023.19 C60.2@15614.53,24025 ; 15631.62,23871.61 15612.72,23852.71 15612.72,23790.72 15630.29,23773.15 15645,23773.15 C59.1@15645,23735 16084.8,23735 MEJ1.5@16159.8,23660
  Top Layer w25: R43.2@15770,23917.4 R43.2@15780,23917.4
  Top Layer w30: Con2.3@15230,23775 Con2.2@15230,23575 Con2.1@15430,23575 Con2.0@15430,23775 15430,23790 15457.4,23817.4 ZD2.2@15457.4,23867.76 15457.4,23871.61 15485,23871.61 ; GaN1.SS@15237.91,24571.97 15240.71,24569.17 15355,24569.17 ; Rdis1.2@15375,24569.53 15429.53,24569.53 15462.4,24602.4 ZD1.2@15462.4,24667.76 ; Rdis2.2@15449.53,24020 15449.53,24015.62 15485,23980.15 15485,23871.61 ; v1(15490,24360) 15492.72,24357.28 GD1.5@15492.72,24310 ; C60.2@15614.53,24025 15619.53,24030 15729.85,24030 15770,23989.85 R43.2@15770,23917.4 ; XC1.2@15652.15,23879.92 15643.84,23871.61 15631.62,23871.61 15485,23871.61
  Middle 1 w30: 15360,24210 15360,24284.85 15395.15,24320 15442.78,24320 15555,24432.22 Con1.3@15555,24510 ; Con1.3@15555,24510 Con1.0@15555,24710 Con1.1@15755,24710 Con1.2@15755,24510 Con1.3@15555,24510
  Bottom Layer w20: C58.1@16113.15,23785 16113.15,23706.65 MEJ1.5@16159.8,23660
  Bottom Layer w30: Con1.3@15555,24510 15495,24450 C37.2@15495,24350 15586.54,24441.54 15586.54,24455.09 15626.45,24495 C36.2@15655,24495
  other v1: 15225,24090 15245,24090 15265,24090 15225,24120 15245,24120 15265,24120 15450,24360 15470,24360 15510,24360 15530,24360 15550,24360 15450,24380 15470,24380 15490,24380 15510,24380 15530,24380 15550,24380 15450,24400 15470,24400 15490,24400 15510,24400 15530,24400 15550,24400 15450,24420 15470,24420 15490,24420 15510,24420 15530,24420 15550,24420 15450,24440 15470,24440 15490,24440 15510,24440 15530,24440 15550,24440 15450,24460 15470,24460 15490,24460 15510,24460 15530,24460 15550,24460 15225,24558 15247,24558 15266,24559 15225,24587 15246,24587 15265,24587
  other v2: 15630,23740
GND_P2: C46.2 C47.2 C63.1 C64.1 C65.2 Con5.0 Con5.1 Con5.2 Con5.3 Con6.0 Con6.1 Con6.2 Con6.3 GaN5.SS GaN6.SS GD3.5 MEJ2.5 R45.2 R46.2 Rdis5.2 Rdis6.2 XC2.2 ZD5.2 ZD6.2 | length 1870.2
  Top Layer w30: R45.2@20774,24814.6 20869.25,24814.6 C64.1@20886,24797.85 21020.68,24797.85 C65.2@21024,24794.53 21025,24795.53 R46.2@21025,24880.6 21121.11,24880.6 XC2.2@21123.63,24878.08 21130.55,24885 21304,24885 21348.8,24929.8 21365.07,24929.8 ; GD3.5@21308.28,24444 v2(21308.28,24399.28) 21308.28,24308.72 C46.2@21312,24305 ; v1(21371,24945) 21365.07,24939.07 21365.07,24929.8 ; Rdis6.2@21373,24830.53 21373,24860.92 21365.07,24868.85 21365.07,24929.8 ; 21383.92,24223.92 21403,24243 Rdis5.2@21403,24262.47 ; ZD5.2@21504.24,24929.4 21504.24,24929.8 21365.07,24929.8
  Top Layer w50: C63.1@20485.85,24858 20438,24810.15 MEJ2.5@20438,24752 20502.53,24687.47 20714.47,24687.47 20774,24747 R45.2@20774,24814.6 ; C46.2@21312,24305 21312,24295.84 21383.92,24223.92
  Bottom Layer w30: C47.2@21291,24382 v2(21308.28,24399.28)
  other v1: 21125,24030 21150,24030 21175,24030 21200,24030 21225,24030 21250,24030 21275,24030 21300,24030 21325,24030 21350,24030 21125,24055 21150,24055 21175,24055 21200,24055 21225,24055 21250,24055 21275,24055 21300,24055 21325,24055 21350,24055 21125,24077 21150,24077 21175,24077 21200,24077 21225,24077 21250,24077 21275,24077 21300,24077 21325,24077 21350,24077 21125,24102 21150,24102 21175,24102 21200,24102 21225,24102 21250,24102 21275,24102 21300,24102 21325,24102 21350,24102 21125,24127 21150,24127 21175,24127 21200,24127 21225,24127 21250,24127 21275,24127 21300,24127 21325,24127 21350,24127 21125,24152 21150,24152 21175,24152 21200,24152 21225,24152 21250,24152 21275,24152 21300,24152 21325,24152 21350,24152 21125,24177 21150,24177 21175,24177 21200,24177 21225,24177 21250,24177 21275,24177 21300,24177 21325,24177 21350,24177 21557,24226 21575,24226 21593,24226 21557,24254 21576,24254 21593,24254 21552,24694 21571,24694 21589,24694 21553,24724 21571,24724 21589,24724 21346,24945 21396,24945 21421,24945 21446,24945 21471,24945 21496,24945 21521,24945 21323,24946 21346,24970 21371,24970 21396,24970 21421,24970 21446,24970 21471,24970 21496,24970 21521,24970 21323,24971 21346,24995 21371,24995 21396,24995 21421,24995 21446,24995 21471,24995 21496,24995 21521,24995 21323,24996 21346,25020 21371,25020 21396,25020 21421,25020 21446,25020 21471,25020 21496,25020 21521,25020 21323,25021 21346,25045 21371,25045 21396,25045 21421,25045 21446,25045 21471,25045 21496,25045 21521,25045 21323,25046
GND_S: C01.2 C02.2 C03.2 C04.2 C05.2 C011.2 C022.2 C033.2 C044.2 C055.2 Ls1.3 Ls2.3 P2.19 P2.20 P2.25 P2.26 R14.1 R20.1 TP12.1 | length 23231.4
  Top Layer w30: 17081,29070 17558,29070 17800,29312 TP12.1@17800,29562
  Top Layer w40: v2(19328,24053) 19342.6,24038.4 R14.1@19342.6,23961 19350,23953.6 P2.20@19350,23850 ; P2.25@19650,23750 P2.26@19650,23850 19650,23962.6 R20.1@19650.4,23963 19650.4,24192.4 19699,24241 v2(19699,24274)
  Top Layer w50: P2.19@19350,23750 P2.20@19350,23850
  Top Layer w85: C05.2@17036.52,29095 C03.2@17036.52,28702.5 C02.2@17036.52,28506.25 C01.2@17036.52,28310 17410.43,28310 Ls1.3@17436.1,28335.67 ; C055.2@20425.52,28124 20428.52,28127 C044.2@20428.52,28326.75 ; C044.2@20425.52,28323.75 C044.2@20428.52,28326.75 ; C011.2@20428.52,28923 C044.2@20428.52,28326.75 ; Ls2.3@20886,28344 20445.77,28344 C044.2@20428.52,28326.75
  Middle 1 w200: Ls1.3@17436.1,28335.67 17478.77,28293 18159,28293 18782,28916 19734.11,28916 ; 19782.64,28916 20314,28916 Ls2.3@20886,28344
  Middle 4 w30: Ls1.3@17436.1,28335.67 17389.77,28382 17121,28382 17079,28340 17079,28305 17452,27932 17452,26357 18795,25014 18795,24953.71 18761,24919.71 18761,24878.29 18795,24844.29 18795,24407 19058,24144 19237,24144 v2(19328,24053) ; v2(19699,24274) 19671,24302 19671,24336 19584,24423 19584,24873 20086,25375 20086,27658 19862,27882 19862,27958 19966,28062 20452,28062 20734,28344 Ls2.3@20886,28344
  HF Layer w200: Ls1.3@17436.1,28335.67 17481.77,28290 18157,28290 18784,28917 20313,28917 Ls2.3@20886,28344
GND_S1: C41.2 C42.2 C97.1 C98.1 C99.2 Con3.0 Con3.1 Con3.2 Con3.3 Con4.0 Con4.1 Con4.2 Con4.3 GaN3.SS GaN4.SS GD2.5 MEJ3.5 R86.2 R87.2 Rdis3.2 Rdis4.2 XC4.2 ZD3.2 ZD4.2 | length 1416.8
  Top Layer w30: ZD4.2@15321.04,27597.15 15367.15,27597.15 15412.53,27642.53 Rdis3.2@15412.53,27781 ; ZD3.2@15346.4,28310.76 15346.4,28292.6 15363.53,28275.47 Rdis4.2@15363.53,28213 15382.26,28213 15445,28150.26 15409.72,28114.98 GD2.5@15409.72,28061 ; C99.2@15482.47,27742 15482.47,27661.62 C98.1@15451,27630.15 15529.25,27630.15 R86.2@15543,27616.4 15567.6,27616.4 15589,27595 15746.45,27595 XC4.2@15750.37,27598.92 15842.52,27598.92 R87.2@15847,27603.4
  Bottom Layer w30: C42.2@15435,28098 15435,28249 v1(15439,28253) ; C97.1@16179.15,27730 16233,27676.15 MEJ3.5@16233,27596
  other v1: 15408,27665 15428,27665 15448,27665 15467,27665 15486,27665 15408,27685 15428,27685 15448,27685 15468,27685 15485,27685 15467,27704 15485,27704 15408,27705 15428,27705 15448,27705 15408,27725 15428,27725 15448,27725 15468,27725 15485,27725 15408,27745 15428,27745 15448,27745 15468,27745 15485,27745 15124,27755 15143,27755 15161,27755 15408,27765 15428,27765 15448,27765 15468,27765 15484,27765 15124,27783 15142,27783 15160,27783 15406,28060 15429,28060 15430,28083 15386,28152 15379,28233 15379,28253 15399,28253 15419,28253 15459,28253 15479,28253 15501,28253 15521,28253 15541,28253 15379,28273 15399,28273 15419,28273 15439,28273 15459,28273 15479,28273 15501,28273 15521,28273 15541,28273 15122,28275 15140,28275 15158,28275 15379,28293 15399,28293 15419,28293 15439,28293 15459,28293 15479,28293 15501,28293 15521,28293 15541,28293 15122,28303 15140,28304 15158,28304 15379,28313 15399,28313 15419,28313 15439,28313 15459,28313 15479,28313 15501,28313 15521,28313 15541,28313
GND_S2: C51.2 C52.2 C102.1 C103.1 C104.2 Con7.0 Con7.1 Con7.2 Con7.3 Con8.0 Con8.1 Con8.2 Con8.3 GaN7.SS GaN8.SS GD4.5 MEJ4.5 R89.2 R90.2 Rdis7.2 Rdis8.2 XC5.2 ZD7.2 ZD8.2 | length 1999.6
  Top Layer w30: C102.1@21170,28448.85 21209.54,28409.31 MEJ4.5@21336,28409.31 ; C103.1@21703.15,28350 21703.15,28394.24 21712.65,28403.75 21712.65,28466.66 21682.34,28466.66 XC5.2@21666,28483 21702,28483 ; R90.2@21725.4,28623 21725.4,28506.4 21702,28483 ; C51.2@21802,27948 21802,28001 v2@21873.47,28072.47 ; C104.2@21835.53,28359 21867,28390.47 21867,28431.85 ; R89.2@21868,28519.6 21831.4,28483 ; GD4.5@21879.14,28097.86 GD4.5@21885.28,28104 ; v2@21889,28088 v2(21875,28074) v2@21873.47,28072.47 ; ZD7.2@21943.6,27875.24 21876.76,27875.24 21873.47,27878.53 Rdis8.2@21873.47,27944 v2@21873.47,28072.47 ; ZD8.2@21986.6,28602.24 21986.2,28602.24 21986.2,28477.73 Rdis7.2@21945,28436.53 21940.32,28431.85 21867,28431.85 ; 21702,28483 21831.4,28483 ; 21831.4,28483 21833,28483 21867,28449 21867,28431.85
  Middle 1 w30: MEJ4.5@21336,28409.31 21347.31,28398 21545.29,28398 21546.29,28399 21648,28399 v2(21709,28338)
  Bottom Layer w30: C52.2@21875,28067 v2(21875,28074)
  other v1: 21645,27743 21670,27743 21695,27743 21720,27743 21745,27743 21770,27743 21795,27743 21820,27743 21845,27743 21870,27743 21645,27768 21670,27768 21695,27768 21720,27768 21745,27768 21770,27768 21795,27768 21820,27768 21845,27768 21870,27768 21645,27793 21670,27793 21695,27793 21720,27793 21745,27793 21770,27793 21795,27793 21820,27793 21845,27793 21870,27793 21645,27818 21670,27818 21695,27818 21720,27818 21745,27818 21770,27818 21795,27818 21820,27818 21845,27818 21870,27818 21645,27843 21670,27843 21695,27843 21720,27843 21745,27843 21770,27843 21795,27843 21820,27843 21845,27843 21870,27843 22099,27863 22116,27863 22134,27864 22099,27891 22117,27891 22134,27891 21885,28012 21911,28012 21862,28013 21835,28014 21835,28035 21862,28035 21887,28035 21911,28036 21836,28058 21911,28060 21911,28081 22115,28339 22134,28339 22097,28340 22097,28368 22114,28368 22133,28368
GND_SS1: GaN3.S GaN4.S Ls1.4 pad.@14636,28092 pad.@15032,28092 pad.@15127,28455 pad.@15131,27925 R16.1 R57.2 T1.3 TP11.1 | length 2315.9
  Top Layer w30: v2(17541,27897) 17575.6,27897 R57.2@17576.6,27896
  Middle 1 w30: 16164,28975 16164,28196 16283,28077 17238,28077 17418,27897 v2(17541,27897)
  other v1: 14970,27700 14995,27700 15020,27700 15045,27700 15070,27700 15095,27700 14970,27725 14995,27725 15020,27725 15045,27725 15070,27725 15095,27725 14970,27750 14995,27750 15020,27750 15045,27750 15070,27750 15095,27750 14970,27775 14995,27775 15020,27775 15045,27775 15070,27775 15095,27775 14970,27800 14995,27800 15020,27800 15045,27800 15070,27800 15095,27800 14970,27825 14995,27825 15020,27825 15045,27825 15070,27825 15095,27825 15120,27825 15145,27825 14970,27850 14995,27850 15020,27850 15045,27850 15070,27850 15095,27850 15120,27850 15145,27850 14970,27875 14995,27875 15020,27875 15045,27875 15070,27875 15095,27875 15120,27875 15145,27875 14970,27900 14995,27900 15020,27900 15045,27900 15070,27900 15095,27900 15120,27900 15145,27900 14970,27925 14995,27925 15020,27925 15045,27925 15070,27925 15095,27925 15120,27925 15145,27925 14970,27950 14995,27950 15020,27950 15045,27950 15070,27950 15095,27950 15120,27950 15145,27950 14968.9,28220 14993.9,28220 15018.9,28220 15043.9,28220 15068.9,28220 15093.9,28220 14968.9,28245 14993.9,28245 15018.9,28245 15043.9,28245 15068.9,28245 15093.9,28245 14968.9,28270 14993.9,28270 15018.9,28270 15043.9,28270 15068.9,28270 15093.9,28270 14968.9,28295 14993.9,28295 15018.9,28295 15043.9,28295 15068.9,28295 15093.9,28295 14968.9,28320 14993.9,28320 15018.9,28320 15043.9,28320 15068.9,28320 15093.9,28320 14968.9,28345 14993.9,28345 15018.9,28345 15043.9,28345 15068.9,28345 15093.9,28345 15118.9,28345 15143.9,28345 14968.9,28370 14993.9,28370 15018.9,28370 15043.9,28370 15068.9,28370 15093.9,28370 15118.9,28370 15143.9,28370 14968.9,28395 14993.9,28395 15018.9,28395 15043.9,28395 15068.9,28395 15093.9,28395 15118.9,28395 15143.9,28395 14968.9,28420 14993.9,28420 15018.9,28420 15043.9,28420 15068.9,28420 15093.9,28420 15118.9,28420 15143.9,28420 14968.9,28445 14993.9,28445 15018.9,28445 15043.9,28445 15068.9,28445 15093.9,28445 15118.9,28445 15143.9,28445 14968.9,28470 14993.9,28470 15018.9,28470 15043.9,28470 15068.9,28470 15093.9,28470 15118.9,28470 15143.9,28470